# EAGLE board MSOP8_TSSOP8 (EAGLE 6.4)
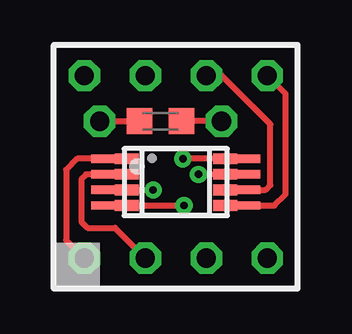
[diagram p0: board, top side]
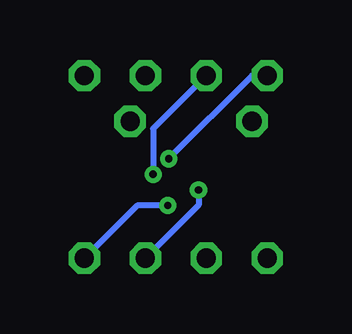
[diagram p1: board, bottom side, seen from below]

No outline drawn. Coordinates in mm, seen from the top.
Copper layers (1*16): Top 0.035mm / dielectric 1.5mm / Bottom 0.035mm
Design rules "default": minimum track width 10mil, minimum drill 0.6mm, track to track 8mil, track to pad 8mil, pad to pad 8mil, via to via 8mil, smd to smd 8mil, copper to edge 40mil, drill to drill 8mil, minimum pad ring 10mil, minimum via ring 8mil, stop-mask expansion 4mil, vias tented up to drill 0mil, thermal gap 10mil

## Footprints (pad centres in the part's own frame; a part is rotated, then mirrored left to right if it is on the bottom)
TSSOP8 = smd 1.2 x 0.35: 1 -2.925,0.975; 2 -2.925,0.325; 3 -2.925,-0.325; 4 -2.925,-0.975; 5 2.925,-0.975; 6 2.925,-0.325; 7 2.925,0.325; 8 2.925,0.975
MSOP8 = smd 0.45 x 1: 1 -0.975,-2.05; 2 -0.325,-2.05; 3 0.325,-2.05; 4 0.975,-2.05; 5 0.975,2.05; 6 0.325,2.05; 7 -0.325,2.05; 8 -0.975,2.05
C0603K = smd 1.05 x 1.08: 1 -0.875,0; 2 0.875,0
1 = drill 0.8 octagon: P$1 0,0

## Placement (x,y rotation side)
E$19  [TSSOP8]  5.08,4.45 0 top
E$20  [MSOP8]  5.08,4.45 270 top
E$21  [C0603K]  4.45,6.99 0 top
E$22  [1]  1.27,8.89 0 top
E$23  [1]  3.81,8.89 0 top
E$24  [1]  6.35,8.89 0 top
E$25  [1]  8.89,8.89 0 top
E$26  [1]  1.27,1.27 0 top
E$27  [1]  3.81,1.27 0 top
E$28  [1]  6.35,1.27 0 top
E$29  [1]  8.89,1.27 0 top
E$30  [1]  1.91,6.99 0 top
E$31  [1]  6.99,6.99 0 top

## Library data of the parts
E$19-E$21 = ref-packages
E$22-E$31 = drill

## Nets
S$15: E$19.2 E$20.2 E$27.P$1
S$16: E$19.3 E$20.3 E$28.P$1
S$17: E$19.1 E$20.1 E$26.P$1
S$18: E$19.4 E$20.4 E$29.P$1
S$19: E$19.8 E$20.8 E$22.P$1
S$20: E$19.7 E$20.7 E$23.P$1
S$21: E$19.6 E$20.6 E$24.P$1
S$22: E$19.5 E$20.5 E$25.P$1
S$23: E$21.1 E$30.P$1
S$24: E$21.2 E$31.P$1

## Tracks (layer width: path | path; a pad name or v marks a point on that pad's centre or on a via)
S$15
  Top 0.254: E$27.P$1 2.54,2.54 1.4,2.54 1.14,2.79 1.14,4.57 1.34,4.77 E$19.2 E$20.2
S$16  (via drill 0.3)
  Top 0.254: E$19.3 E$20.3 v4.13,4.12
  Bottom 0.254: v4.13,4.12 4.13,3.48 E$28.P$1
S$17
  Top 0.254: E$26.P$1 0.51,2.03 0.51,4.95 0.97,5.42 E$19.1 E$20.1
S$18  (via drill 0.3)
  Top 0.254: E$20.4 v5.42,3.47 E$19.4
  Bottom 0.254: v5.42,3.47 6.69,3.47 E$29.P$1
S$19  (via drill 0.3)
  Top 0.254: v5.38,5.42 E$20.8 E$19.8
  Bottom 0.254: E$22.P$1 1.91,8.89 v5.38,5.42
S$20  (via drill 0.3)
  Top 0.254: E$19.7 E$20.7 v6.03,4.77
  Bottom 0.254: E$23.P$1 6.03,6.67 v6.03,4.77
S$21
  Top 0.254: E$24.P$1 6.99,8.89 9.02,6.86 9.02,4.32 8.82,4.12 E$19.6 E$20.6
S$22
  Top 0.254: E$25.P$1 9.65,8.13 9.65,3.94 9.19,3.47 E$19.5 E$20.5
S$23
  Top 0.254: E$30.P$1 E$21.1
S$24
  Top 0.254: E$31.P$1 E$21.2